# EAGLE board Training Task 1 (EAGLE 7.6.0)

Size 73.58 x 63.39 mm. Coordinates in mm from the lower left corner, seen from the top.
Outline: 0,0 56.82,0 56.82,53.33 0,53.33 0,0
Copper layers (1*16): Top 0.035mm / dielectric 1.5mm / Bottom 0.035mm
Design rules "default": minimum track width 10mil, minimum drill 24mil, track to track 8mil, track to pad 8mil, pad to pad 8mil, via to via 8mil, smd to smd 8mil, copper to edge 40mil, drill to drill 8mil, minimum pad ring 10mil, minimum via ring 8mil, stop-mask expansion 4mil, vias tented up to drill 0mil, thermal gap 10mil

## Footprints (pad centres in the part's own frame; a part is rotated, then mirrored left to right if it is on the bottom)
HDSP-M = drill 0.813 long: 1 -5.08,-7.62; 2 -2.54,-7.62; 3 0,-7.62; 4 2.54,-7.62; 5 5.08,-7.62; 6 5.08,7.62; 7 2.54,7.62; 8 0,7.62; 9 -2.54,7.62; 10 -5.08,7.62
0207/10 = drill 0.813 octagon: 1 -5.08,0; 2 5.08,0
B25V = drill 0.813 long: A 2.54,0.635; E -2.54,0.635; S 0,0.635
ARDUINO_UNO = drill 1.016 pad 1.88: 0 63.5,50.8; 1 60.96,50.8; 2 58.42,50.8; 3 55.88,50.8; 3.3V 35.56,2.54; 4 53.34,50.8; 5 50.8,50.8; 5V 38.1,2.54; 6 48.26,50.8; 7 45.72,50.8; 8 41.656,50.8; 9 39.116,50.8; 10 36.576,50.8; 11 34.036,50.8; 12 31.496,50.8; 13 28.956,50.8; A0 50.8,2.54; A1 53.34,2.54; A2 55.88,2.54; A3 58.42,2.54; A4 60.96,2.54; A5 63.5,2.54; AREF 23.876,50.8; GND 26.416,50.8; GND. 43.18,2.54; GND.. 40.64,2.54; I/OREF 30.48,2.54; N/C 27.94,2.54; RESET 33.02,2.54; SCL 18.796,50.8; SDA 21.336,50.8; VIN 45.72,2.54 | hole 3.2: 66.04,7.62; 66.04,35.56; 15.24,50.8; 13.97,2.54
DIL16 = drill 0.813 long: 1 -8.89,-3.81; 2 -6.35,-3.81; 3 -3.81,-3.81; 4 -1.27,-3.81; 5 1.27,-3.81; 6 3.81,-3.81; 7 6.35,-3.81; 8 8.89,-3.81; 9 8.89,3.81; 10 6.35,3.81; 11 3.81,3.81; 12 1.27,3.81; 13 -1.27,3.81; 14 -3.81,3.81; 15 -6.35,3.81; 16 -8.89,3.81

## Placement (x,y rotation side)
Digit1  [HDSP-M]  5,22.78 0 top
Digit2  [HDSP-M]  5,35.48 0 top
R1  400‎Ω  [0207/10]  5,98.98 0 top  (outside the outline)
R2  400‎Ω  [0207/10]  5,86.28 0 top  (outside the outline)
Rpot1  250k‎Ω  [B25V]  5,73.58 0 top  (outside the outline)
U1  [ARDUINO_UNO]  5,10.08 0 top
U2  [DIL16]  5,48.18 0 top
U3  [DIL16]  5,60.88 0 top

## Library data of the parts
Digit1 Digit2 R1 R2 Rpot1 U1-U3 = AUTODESK_CIRCUITS_BREADBOARD

## Nets
N$1: Digit1.3
N$2: Digit1.5
N$3: U1.2 U3.7
N$4: U1.5 U3.6
N$5: Digit2.1 U3.9
N$6: Digit2.2 U3.10
N$7: Digit2.6 U3.12
N$8: Digit2.7 U3.13
N$9: U1.3 U3.1
N$10: U1.4 U3.2
N$11: Digit2.9 U3.15
N$12: Digit2.5
N$13: Digit2.3
N$14: Digit2.10 U3.14
N$15: Digit1.8 R2.2
N$16: Digit2.8 R1.2
N$17: Digit1.9 U2.15
N$18: Digit1.10 U2.14
N$19: Digit1.4 U2.11
N$20: Digit1.1 U2.9
N$21: Digit1.2 U2.10
N$22: Digit1.6 U2.12
N$23: Digit1.7 U2.13
N$24: U1.11 U2.6
N$25: U1.9 U2.1
N$26: U1.10 U2.2
N$27: Digit2.4 U3.11
N$28: U1.8 U2.7
N$29: Rpot1.E U1.5V U2.3 U2.4 U2.16 U3.3 U3.4 U3.16
N$30: Rpot1.S U1.A0
N$31: R1.1 R2.1 Rpot1.A U1.GND. U2.5 U2.8 U3.5 U3.8

## Tracks (layer width: path | path; a pad name or v marks a point on that pad's centre or on a via)
N$3  (1 unrouted)
N$4  (1 unrouted)
N$5  (1 unrouted)
N$6  (1 unrouted)
N$7  (1 unrouted)
N$8  (1 unrouted)
N$9  (1 unrouted)
N$10  (1 unrouted)
N$11  (1 unrouted)
N$14  (1 unrouted)
N$15  (1 unrouted)
N$16  (1 unrouted)
N$17  (1 unrouted)
N$18  (1 unrouted)
N$19  (1 unrouted)
N$20  (1 unrouted)
N$21  (1 unrouted)
N$22  (1 unrouted)
N$23  (1 unrouted)
N$24  (1 unrouted)
N$25  (1 unrouted)
N$26  (1 unrouted)
N$27  (1 unrouted)
N$28  (1 unrouted)
N$29  (7 unrouted)
N$30  (1 unrouted)
N$31  (7 unrouted)